# Altium PCB Seadragon_thruster_PDB.PcbDoc
Units mm, origin at the board's own origin, x right, y up, seen from the top; angles counter-clockwise.
Board outline 177.8 x 123.82 mm, 4 copper layers (Top Layer, GND, Layer 2, Bottom Layer), stack 0.603 mm thick; 35 components, 24 nets, 112 pads, 0 vias.
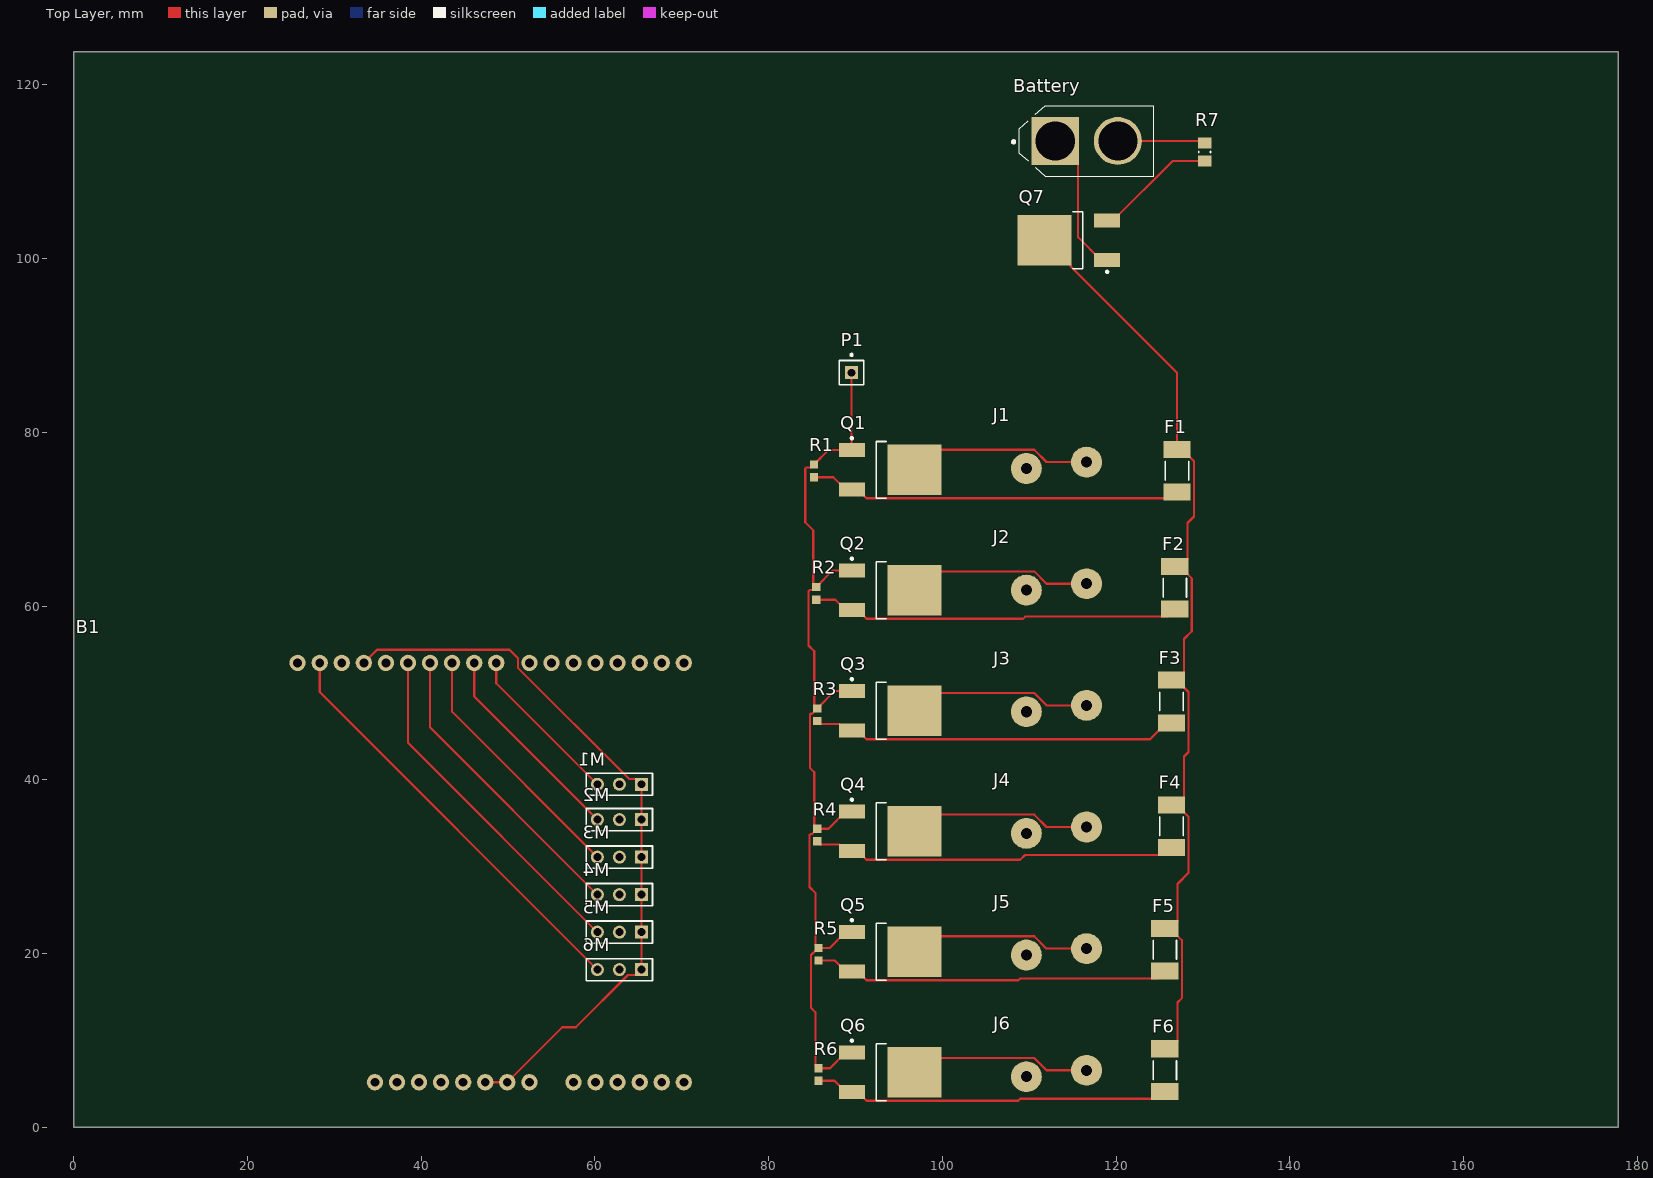
[diagram p0: Top Layer view]
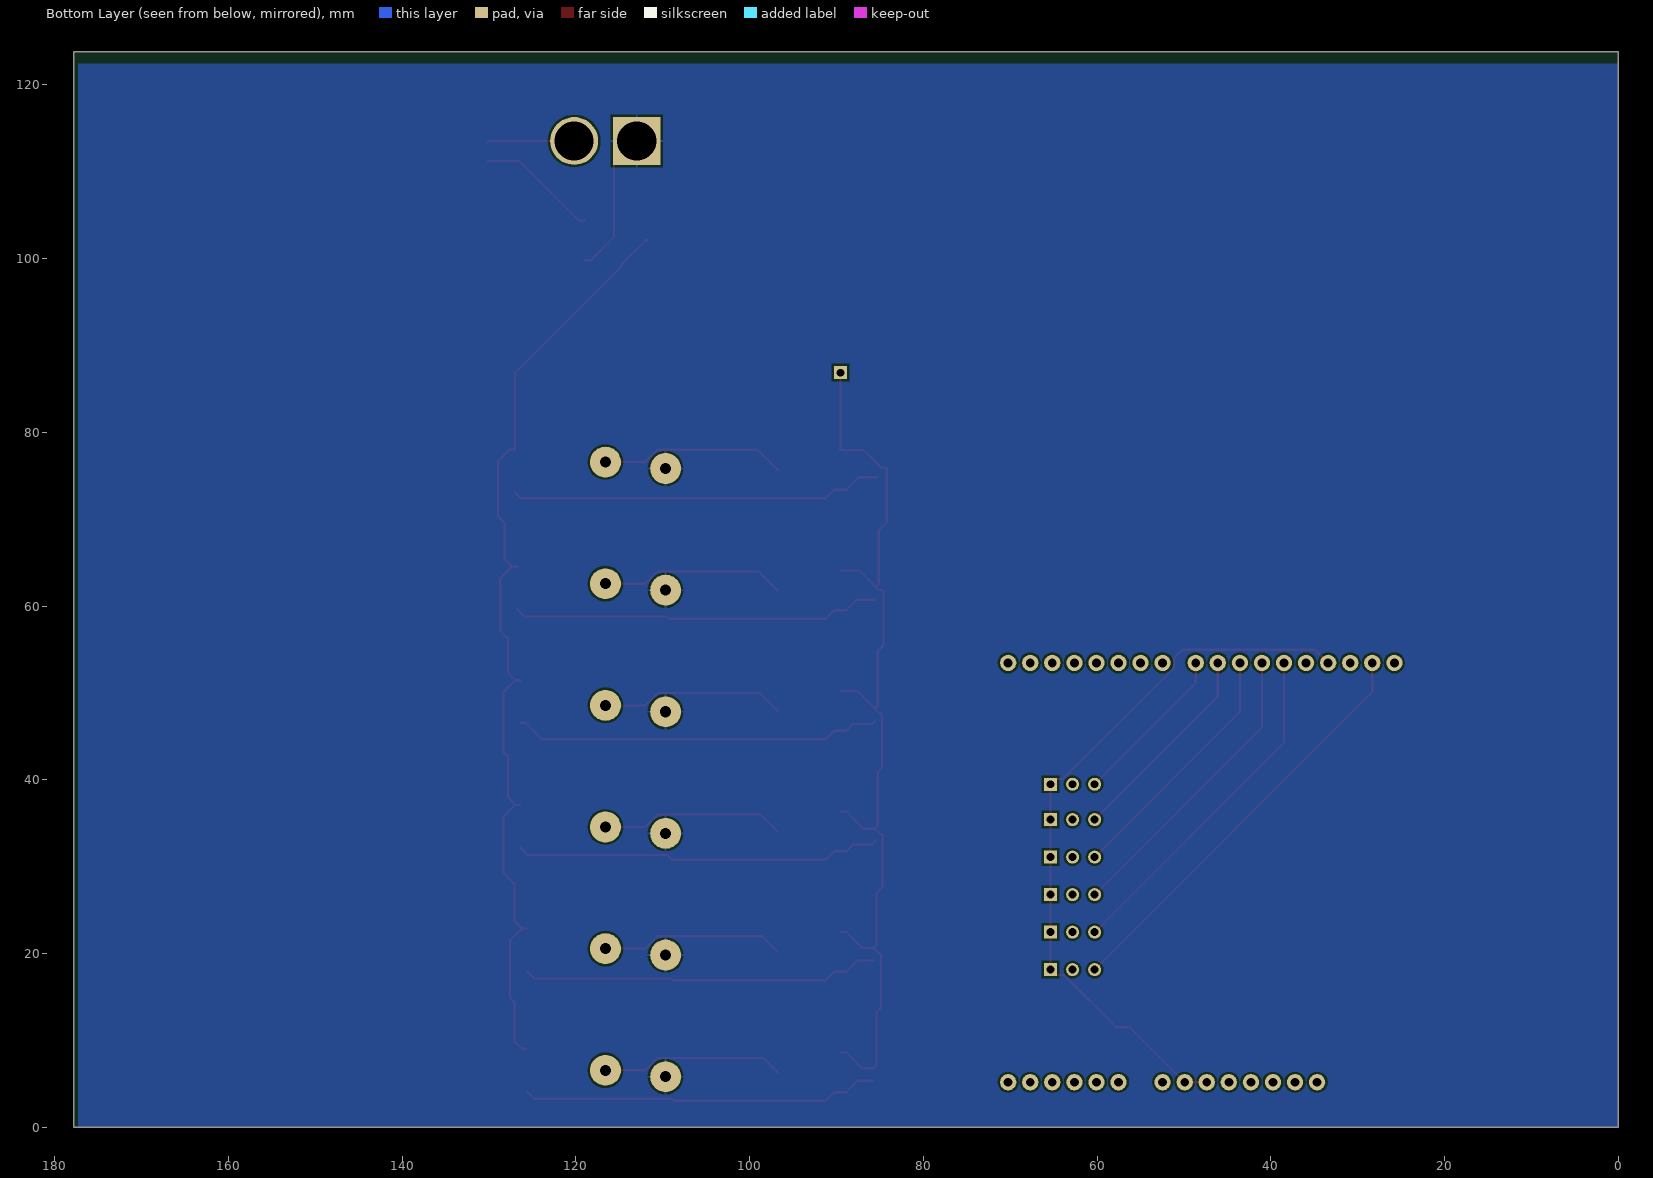
[diagram p1: Bottom Layer view, seen from below]

## Layer stack, top to bottom
Top Solder: solder mask 0.0102, Solder Resist, Dk 3.5
Top Layer: signal copper 0.0356
Dielectric 2: prepreg 0.0711, PP-006, Dk 4.1
GND: signal copper 0.035
Dielectric 1: dielectric 0.32, FR-4, Dk 4.8
Layer 2: signal copper 0.035
Dielectric 3: prepreg 0.0711, PP-006, Dk 4.1
Bottom Layer: signal copper 0.0356
Bottom Solder: solder mask 0.0102, Solder Resist, Dk 3.5

## Board outline
0,0 177.8,0 177.8,123.825 0,123.825

## Design rules (kind name [scope] priority, off if disabled: settings)
Clearance [All] p1: gap=0.254 ignorepadtopadclearanceinfootprint=FALSE except(0: Arc-Hole Track-Hole SMDPad-Hole THPad-Hole Via-Hole Fill-Hole Poly-Hole Region-Hole Text-Hole)
PolygonConnect [All] p1: connectstyle=Relief reliefconductorwidth=0.254 reliefentries=4 polygonreliefangle="90 Angle" airgapwidth=0.254
RoomDefinition MOSFET_killswitch [InComponentClass('MOSFET_killswitch')] p1: confinementstyle=ConfineIn formatcopy=TRUE lockcomponents=FALSE outline 176.784,2.074 391.795,2.074 391.795,22.267 176.784,22.267
RoutingVias [All] p1: holewidth=0.711 width=1.27 viastyle="Through Hole" minholewidth=0.711 minwidth=1.27 maxholewidth=0.711 maxwidth=1.27
SolderMaskExpansion [All] p1: expansion=0.102
Width [All] p1: maxlimit=0.254 minlimit=0.254 preferedwidth=0.254
30 further rules are at their usual default settings.

## Components (designator, comment, footprint, x,y, rotation, side; value= is the part's Value field where it differs from the comment)
B1 "ARDUINO_UNO_R3_SHIELDBASIC" UNO_R3_SHIELD 44.837,29.337 r270 top
Battery "XT60-M" *AMASS_XT60-M 116.586,113.538 r0 top
F1 "Fuse" LFUS-45X_V 127,75.565 r270 top
F2 "Fuse" LFUS-45X_V 126.746,62.103 r270 top
F3 "Fuse" LFUS-45X_V 126.365,49.022 r270 top
F4 "Fuse" LFUS-45X_V 126.365,34.671 r270 top
F5 "Fuse" LFUS-45X_V 125.603,20.447 r270 top
F6 "Fuse" LFUS-45X_V 125.603,6.604 r270 top
J1 "Deans" DEANS 116.586,76.581 r270 top
J2 "BATTERY_CONN_DEANS" DEANS 116.586,62.581 r270 top
J3 "BATTERY_CONN_DEANS" DEANS 116.586,48.58 r270 top
J4 "BATTERY_CONN_DEANS" DEANS 116.586,34.58 r270 top
J5 "BATTERY_CONN_DEANS" DEANS 116.586,20.579 r270 top
J6 "BATTERY_CONN_DEANS" DEANS 116.586,6.579 r270 top
M1 "Header 3" HDR1X3 65.363,39.497 r180 top
M2 "Header 3" HDR1X3 65.363,35.433 r180 top
M3 "Header 3" HDR1X3 65.363,31.115 r180 top
M4 "Header 3" HDR1X3 65.363,26.797 r180 top
M5 "Header 3" HDR1X3 65.363,22.479 r180 top
M6 "Header 3" HDR1X3 65.363,18.161 r180 top
P1 "5V" PIN1 89.535,86.868 r0 top
Q1 "MOSFET" ONSC-DPAK-3-369C-01_V 93.98,75.692 r0 top
Q2 "MOSFET" ONSC-DPAK-3-369C-01_V 93.98,61.824 r0 top
Q3 "MOSFET" ONSC-DPAK-3-369C-01_V 93.98,47.955 r0 top
Q4 "MOSFET" ONSC-DPAK-3-369C-01_V 93.98,34.087 r0 top
Q5 "MOSFET" ONSC-DPAK-3-369C-01_V 93.98,20.218 r0 top
Q6 "MOSFET" ONSC-DPAK-3-369C-01_V 93.98,6.35 r0 top
Q7 "MOSFET" ONSC-DPAK-3-369C-01_V 114.554,102.108 r180 top
R1 "10K" RESC1609X55X30NL10T20 85.217,75.565 r270 top
R2 "10K" RESC1609X55X30NL10T20 85.471,61.468 r270 top
R3 "10K" RESC1609X55X30NL10T20 85.598,47.498 r270 top
R4 "10K" RESC1609X55X30NL10T20 85.598,33.655 r270 top
R5 "10K" RESC1609X55X30NL10T20 85.725,19.939 r270 top
R6 "10K" RESC1609X55X30NL10T20 85.725,6.096 r270 top
R7 "1k" RESC2013X50X30ML20T20 130.175,112.268 r270 top

## Footprints (in the part's own frame and the unit in brackets; to place one, negate y for a bottom-side part, rotate by r counter-clockwise, add the part's x,y. Pads: shape width x height; smd on the part's side, far side on the other; paste and mask are expansions set on the pad)
*AMASS_XT60-M [mm]
  rect 5.516x5.516 hole 4.5: 1(-3.6,0)
  round 5.516 hole 4.5: 2(3.6,0)
  silkscreen extent -8.55,-4.05 7.75,4.05
DEANS [mil]
  round 140 / inner round 60 / far side round 140 hole 50: +(0,0) -(29,-272.5)
HDR1X3 [mm] "Connector; Header; 3 Position"
  rect 1.5x1.5 hole 0.9: 1(0,0)
  round 1.5 hole 0.9: 2(2.54,0) 3(5.08,0)
  silkscreen extent -1.27,-1.27 6.35,1.27
LFUS-45X_V [mm] "SMD, 2-Leads, Body 6.1x2.69mm"
  rect 1.96x3.15 smd: 1(-2.455,0) 2(2.455,0)
  silkscreen extent -1.07,-1.35 1.07,1.35, body extent -3.05,-1.34 3.05,1.34, height 2.94
ONSC-DPAK-3-369C-01_V [mm] "DPAK, 3-Leads, Body 6.54x6.095mm, Pitch 2.29mm"
  rect 3x1.6 smd: 1(-4.4,2.29) 3(-4.4,-2.29)
  rect 6.2x5.8 smd: 4(2.8,0)
  silkscreen extent -4.52,-3.27 -0.45,3.76, body extent -1.6,-3.27 4.49,3.27, height 2.38
PIN1 [mm] "Connector; Plug"
  rect 1.5x1.5 hole 0.9: 1(0,0)
  silkscreen extent -1.4,-1.4 1.4,2.17
RESC1609X55X30NL10T20 [mm] "Chip Resistor, 2-Leads, Body 1.60x0.85mm, IPC Medium Density"
  rect 0.95x0.95 smd: 1(-0.725,0) 2(0.725,0)
  body extent -0.85,-0.48 0.85,0.48, height 0.55
RESC2013X50X30ML20T20 [mm] "Chip Resistor, 2-Leads, Body 2.00x1.25mm, IPC Low Density"
  rect 1.25x1.55 smd: 1(-1.025,0) 2(1.025,0)
  silkscreen extent -0.1,-0.67 0.1,0.67, body extent -1.1,-0.72 1.1,0.72, height 0.5
UNO_R3_SHIELD [mil]
  round 74 / inner round 60 / far side round 74 hole 40: 3.3V(950,-100) 5V(950,0) A0(950,500) A1(950,600) A2(950,700) A3(950,800) A4(950,900) A5(950,1000) AREF(-950,-550) D2(-950,800) D3(-950,700) D4(-950,600) D5(-950,500) D6(-950,400) D7(-950,300) D8(-950,150) D9(-950,50) D10(-950,-50) D11(-950,-150) D12(-950,-250) D13(-950,-350) GND@0(950,100) GND@1(950,200) GND@2(-950,-450) IOREF(950,-300) NC(950,-400) RES(950,-200) RX(-950,1000) SCL(-950,-750) SDA(-950,-650) TX(-950,900) VIN(950,300)

## Part data
B1: "Arduino R3 Shield Footprint Shield form compatible with the Arduino Uno R3.    SparkFun Products:  MG2639 Cellular Shield  MIDI Shield R3 Stackable Headers Kit", DeviceName=BASIC, DeviceSetName=ARDUINO_UNO_R3_SHIELD, GateName_1=G$1, LibraryName=SparkFun-Boards, SymbolName_1=ARDUINO_R3_SHIELD
Battery: Package="Package Analog Devices", Availability=Unavailable, MF=AMASS, MP=XT60-M, Price=None, SnapEDA_Link=https://www.snapeda.com/parts/XT60-M/AMASS/view-part/?ref=snap
F1 F2 F3 F4 F5 F6: library part CMP-2000-05687-1, "Fuse, 65 V, 15 A, -55 to 125 degC, 2-Pin SMD, RoHS, Tape and Reel", Current Rating=15A, Manufacturer=Littelfuse, Operating Temp Range=-55to+125°C, Package Description="2-Pin Surface Mount Device, Body 6.1 x 2.69 mm", Package Reference=45X, Working Voltage-Max=65V, Datasheet URL=http://www.littelfuse.com/products/fuses/surface-mount-fuses/nano-2-fuses/~/media/electronics/datasheets/fuses/littelfuse_fuse_451_453_datasheet.pdf.pdf, Datasheet Version=02/2016, Manufacturer URL=http://www.littelfuse.com/, Mounting Technology=SurfaceMount, Response Characteristic=VeryFastActing, Size=6.10x2.69mm
J1: library part BATTERY_CONN_DEANS, Package=DEANS, DeviceName=_DEANS, DeviceSetName=BATTERY_CONN, GateName_1=G$1, LibraryName=SparkFun-Connectors, SF_ID=PRT-11864, SymbolName_1=BATTERY_CONN
J2 J3 J4 J5 J6: "Battery Connectors    Various footprints for battery connections   SparkFun Products:  Deans Connector -M/F Pair", DeviceName=_DEANS, DeviceSetName=BATTERY_CONN, GateName_1=G$1, LibraryName=SparkFun-Connectors, SF_ID=PRT-11864, SymbolName_1=BATTERY_CONN
M1 M2 M3 M4 M5 M6: "Header, 3-Pin", LatestRevisionDate=17-Jul-2002, LatestRevisionNote="Re-released for DXP Platform.", Publisher="Altium Limited"
P1: library part Plug, "Plug", LatestRevisionDate=17-Jul-2002, LatestRevisionNote="Re-released for DXP Platform.", Publisher="Altium Limited"
Q1 Q2 Q3 Q4 Q5 Q6 Q7: library part CMP-1058-00407-1, "Power MOSFET -60 V, -15.5 A, Single P-Channel, 3-Pin DPAK, Pb-Free, Tape and Reel", Manufacturer="On Semiconductor", Package Type=DPAK-3, PartNumber=NTD20P06LT4G, Channel Polarity="P Channel", Ciss Typ (pF)=740, ComponentLink1Description="Manufacturer URL", ComponentLink1URL=http://www.onsemi.com/, ComponentLink2Description=Datasheet, ComponentLink2URL=http://www.onsemi.cn/pub_link/Collateral/NTD20P06L-D.PDF, ComponentLink3Description="Package Specification", ComponentLink3URL=http://www.onsemi.cn/pub_link/Collateral/369C.PDF, Configuration=Single, Coss Typ (pF)=207, Crss Typ (pF)=66, DatasheetVersion="Rev. 6", ID Max (A)=15.5, Mounting Technology="Surface Mount", PackageDescription="3-Pin Flange Mount, Body 6.54 x 6.095 mm, Pitch 2.29 mm", PackageReference=DPAK-3-369C-01, PackageVersion="Rev. E, 02/2014", Packing="Tape and Reel", PD Max (W)=65, Qrr Typ (nC)=0.13, RoHS=Pb-Free, V(BR)DSS Min (V)=60, VGS(th) Max (V)=2, VGS Max (V)=20
R1 R2 R3 R4 R5 R6: library part CMP-2000-03691-1, Manufacturer="Vishay Dale", Part Number=TNPW060310K0BEEA
R7: library part CMP-2001-03598-1, Manufacturer="Vishay Dale", Part Number=CRCW08051K00JNTA

## Nets (pads, with @x,y where several pads share a name; then routed paths per layer and width w, separated by ;. In a path a pad name is that pad's centre, name@x,y a point inside that pad or via, vN(x,y) a via of type N, cw(c..) or ccw(c..) an arc to the next point about the centre after c; other vN are vias at no path point)
GND: Battery.1 J1.- J2.- J3.- J4.- J5.- J6.- Q7.1 | length 16.6
  Top Layer w0.254: Battery.1 115.617,110.907 115.617,102.455 118.254,99.818 Q7.1
NetB1_D8: B1.D8 M1.3 | length 18.8
  Top Layer w0.254: B1.D8 48.647,51.133 M1.3
NetB1_D9: B1.D9 M2.3 | length 23.9
  Top Layer w0.254: B1.D9 46.107,49.609 M2.3
NetB1_D10: B1.D10 M3.3 | length 29.3
  Top Layer w0.254: B1.D10 43.567,47.831 M3.3
NetB1_D11: B1.D11 M4.3 | length 34.6
  Top Layer w0.254: B1.D11 41.027,46.053 M4.3
NetB1_D12: B1.D12 M5.3 | length 40
  Top Layer w0.254: B1.D12 38.487,44.275 M5.3
NetB1_GND@0: B1.GND@0 B1.GND@1 B1.GND@2 M1.1 M2.1 M3.1 M4.1 M5.1 M6.1 | length 84.3
  Top Layer w0.254: 33.407,53.467 34.931,54.991 50.165,54.991 51.136,54.02 51.136,52.92 63.936,40.12 64.74,40.12 M1.1 M2.1 M3.1 M4.1 M5.1 M6.1 64.74,17.538 63.799,17.538 57.789,11.528 56.238,11.528 49.917,5.207 47.377,5.207
NetB1_SDA: B1.SDA M6.3 | length 48.5
  Top Layer w0.254: B1.SDA 28.327,50.117 M6.3
NetBattery_2: Battery.2 R7.1 | length 10.1
  Top Layer w0.254: Battery.2 129.93,113.538 R7.1
NetF1_1: F1.1 F2.1 F3.1 F4.1 F5.1 F6.1 Q7.4 | length 109.3
  Top Layer w0.254: Q7.4 111.954,102.108 114.727,99.335 114.727,99.135 127,86.862 F1.1 127.595,78.02 128.956,76.659 128.956,70.322 128.194,69.56 128.194,65.411 F2.1@127.341,64.558 ; F6.1 126.198,9.059 127.051,9.912 127.051,14.379 127.559,14.887 127.559,21.541 F5.1@126.198,22.902 ; F5.1 F5.1@126.198,22.902 ; F4.1 F4.1@126.96,37.126 ; F3.1 F3.1@126.96,51.477 ; F2.1 F2.1@127.341,64.558 ; F5.1@126.198,22.902 127.051,23.755 127.051,28.031 128.321,29.301 128.321,35.765 F4.1@126.96,37.126 ; F4.1@126.96,37.126 127.813,37.979 127.813,42.7 128.321,43.208 128.321,50.116 F3.1@126.96,51.477 ; F3.1@126.96,51.477 127.813,52.33 127.813,56.225 128.702,57.114 128.702,63.197 F2.1@127.341,64.558
NetF1_2: F1.2 Q1.3 R1.2 | length 43.1
  Top Layer w0.254: R1.2 87.442,74.84 88.88,73.402 Q1.3 90.28,73.402 91.271,72.411 126.301,72.411 F1.2
NetF2_2: F2.2 Q2.3 R2.2 | length 42.6
  Top Layer w0.254: R2.2 87.671,60.743 88.88,59.534 Q2.3 90.28,59.534 91.271,58.543 109.284,58.543 109.536,58.795 125.893,58.795 F2.2
NetF3_2: F3.2 Q3.3 R3.2 | length 42.4
  Top Layer w0.254: R3.2 85.946,46.425 88.12,46.425 88.88,45.665 Q3.3 90.28,45.665 91.271,44.674 123.877,44.674 125.77,46.567 F3.2
NetF4_2: F4.2 Q4.3 R4.2 | length 42.2
  Top Layer w0.254: R4.2 85.946,32.582 88.095,32.582 88.88,31.797 Q4.3 90.28,31.797 91.271,30.806 108.941,30.806 109.498,31.363 125.512,31.363 F4.2
NetF5_2: F5.2 Q5.3 R5.2 | length 41.3
  Top Layer w0.254: R5.2 87.594,19.214 88.88,17.928 Q5.3 90.28,17.928 91.271,16.937 108.738,16.937 108.939,17.139 124.75,17.139 F5.2
NetF6_2: F6.2 Q6.3 R6.2 | length 41.3
  Top Layer w0.254: R6.2 87.569,5.371 88.88,4.06 Q6.3 90.28,4.06 91.271,3.069 108.725,3.069 108.952,3.296 124.75,3.296 F6.2
NetJ1_+: J1.+ Q1.4 | length 21.4
  Top Layer w0.254: Q1.4 99.091,78.003 110.559,78.003 111.981,76.581 J1.+
NetJ2_+: J2.+ Q2.4 | length 21.3
  Top Layer w0.254: Q2.4 98.959,64.003 110.559,64.003 111.981,62.581 J2.+
NetJ3_+: J3.+ Q3.4 | length 21.2
  Top Layer w0.254: Q3.4 98.827,50.002 110.559,50.002 111.981,48.58 J3.+
NetJ4_+: J4.+ Q4.4 | length 21.2
  Top Layer w0.254: Q4.4 98.695,36.002 110.559,36.002 111.981,34.58 J4.+
NetJ5_+: J5.+ Q5.4 | length 21.1
  Top Layer w0.254: Q5.4 98.563,22.001 110.559,22.001 111.981,20.579 J5.+
NetJ6_+: J6.+ Q6.4 | length 21.1
  Top Layer w0.254: Q6.4 98.431,8.001 110.559,8.001 111.981,6.579 J6.+
NetP1_1: P1.1 Q1.1 Q2.1 Q3.1 Q4.1 Q5.1 Q6.1 R1.1 R2.1 R3.1 R4.1 R5.1 R6.1 | length 111.9
  Top Layer w0.254: P1.1 89.535,78.027 Q1.1 86.909,77.982 R1.1 84.895,75.968 84.35,75.968 84.201,75.819 84.201,69.641 85.123,68.719 85.123,62.541 R2.1 ; Q6.1 88.88,8.64 87.061,6.821 R6.1 85.377,7.169 85.377,13.254 84.869,13.762 84.869,19.847 85.092,20.07 85.131,20.07 R5.1 ; Q5.1 88.88,22.508 87.036,20.664 R5.1 ; Q4.1 88.88,36.377 86.883,34.38 R4.1 ; Q3.1 87.62,50.245 R3.1 ; Q2.1 87.392,64.114 R2.1 ; R2.1 85.123,61.845 84.705,61.845 84.582,61.722 84.582,55.481 85.25,54.813 85.25,48.571 R3.1 ; R4.1 85.25,34.728 85.25,40.876 84.742,41.384 84.742,47.531 84.836,47.625 85,47.625 R3.1 ; R4.1 85.004,33.786 84.84,33.786 84.709,33.655 84.709,27.668 85.377,27 85.377,21.012 R5.1
NetQ7_3: Q7.3 R7.2 | length 14.1
  Top Layer w0.254: Q7.3 119.654,104.398 126.499,111.243 R7.2
pads on no net: B1.3.3V B1.5V B1.A0 B1.A1 B1.A2 B1.A3 B1.A4 B1.A5 B1.AREF B1.D2 B1.D3 B1.D4 B1.D5 B1.D6 B1.D7 B1.D13 B1.IOREF B1.NC B1.RES B1.RX B1.SCL B1.TX B1.VIN M1.2 M2.2 M3.2 M4.2 M5.2 M6.2

## Polygon pours and split planes (outlines as drawn)
GND on Bottom Layer "Bottom Layer-GND" (solid, pour order 1): 0,122.428 177.292,122.428 177.292,0 0,0